# Altium PCB ACDC.PcbDoc (part 2 of 2)
Units mil, origin at the board's own origin, x right, y up, seen from the top; angles counter-clockwise.
Board outline 4750 x 3251 mil, 4 copper layers (Top Layer, GND, 3V3, Bottom Layer), stack 23.756 mil thick; 141 components, 109 nets, 697 pads, 528 vias.
Unrouted connection lines stored in the file: 62.
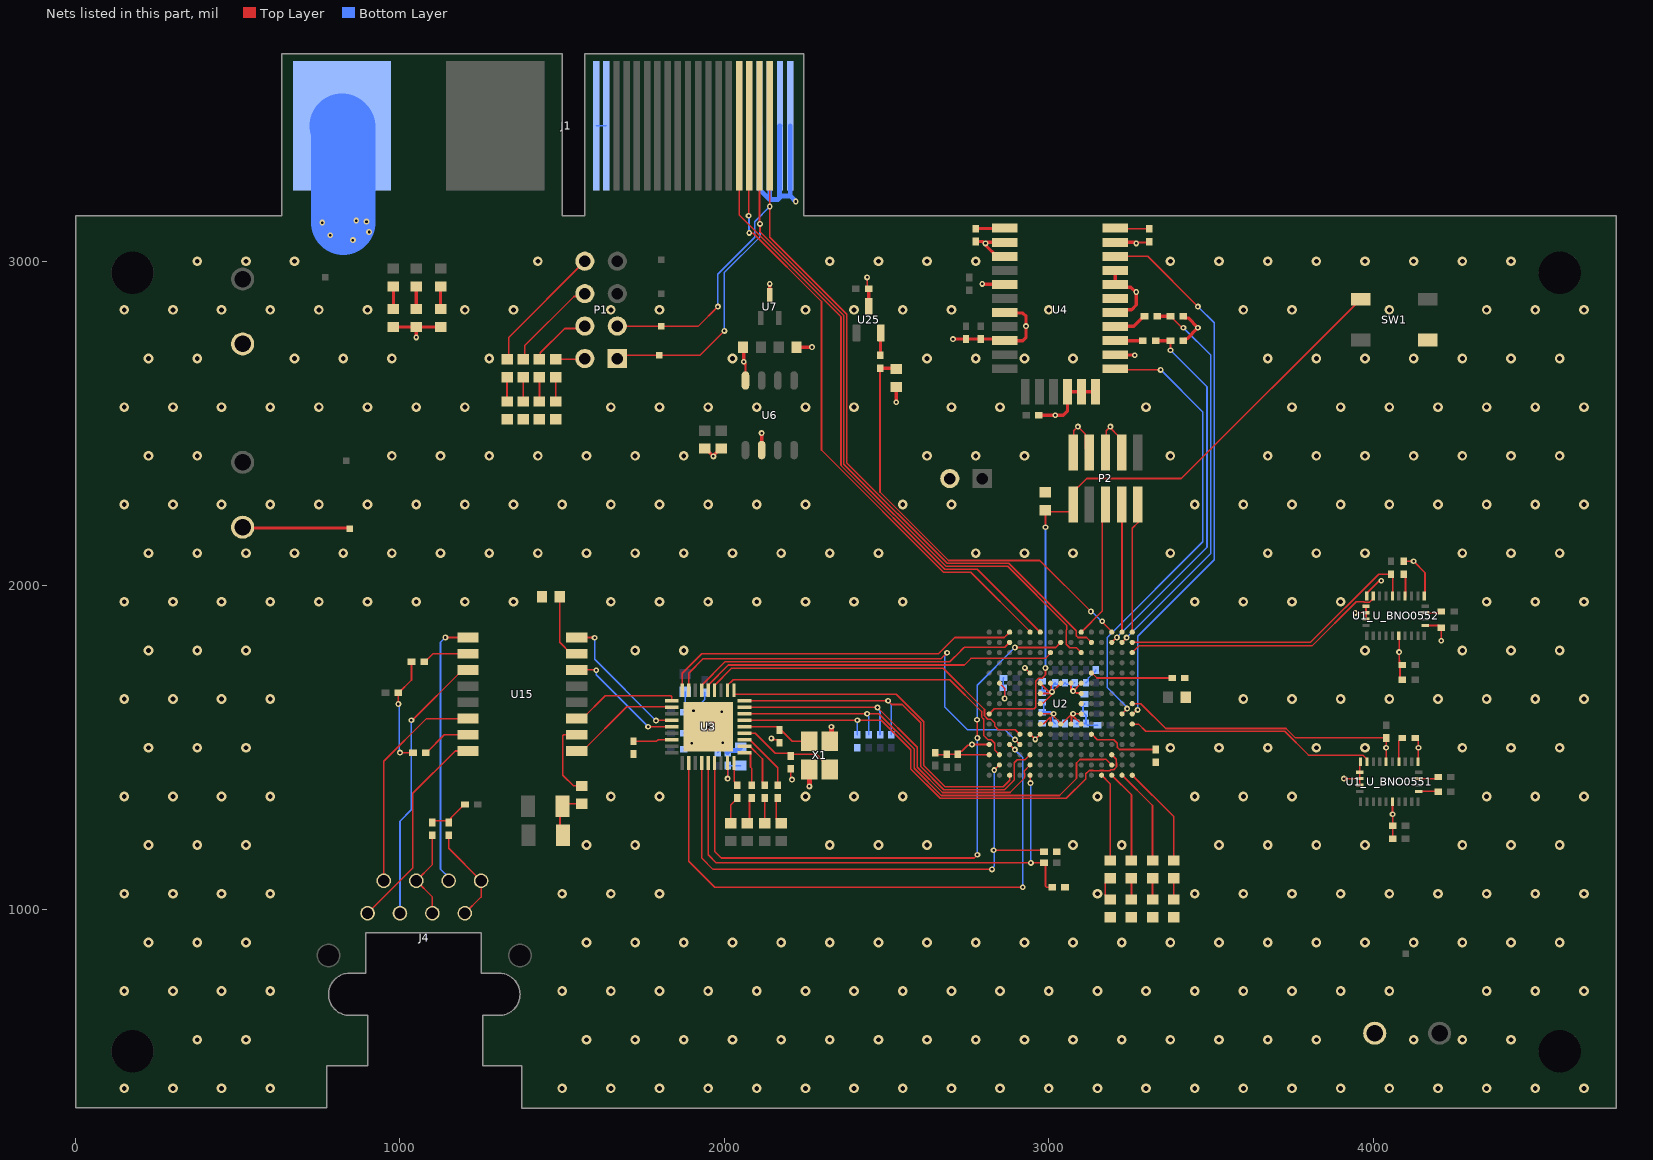
[diagram p4: the nets of this part, all layers, seen from the top]

## Via types
v1: diameter 30, hole 15, Top Layer to Bottom Layer, 352 vias
v2: diameter 18, hole 8, Top Layer to Bottom Layer, 148 vias
v3: diameter 17.72, hole 7.87, Top Layer to Bottom Layer, 27 vias
v4: diameter 18, hole 10, Top Layer to Bottom Layer, 1 vias

## Nets (pads, with @x,y where several pads share a name; then routed paths per layer and width w, separated by ;. In a path a pad name is that pad's centre, name@x,y a point inside that pad or via, vN(x,y) a via of type N, cw(c..) or ccw(c..) an arc to the next point about the centre after c; other vN are vias at no path point) (continued)
FIX': U2.J14 U4.18 | length 1409.9
  Top Layer w5: U4.18@3205.16,2668.39 3208.54,2665 v2(3345,2665) ; U2.J14@3225.98,1604.49 3225.98,1604.68 3241.73,1620.43 v2(3241.73,1620.62)
  Bottom Layer w5: v2(3241.73,1620.62) 3241.73,1624.02 3180,1685.75 3180,1840 3475,2135 3475,2535 v2(3345,2665)
GND: C1_U_BNO0551.1 C1_U_BNO0552.1 C2_U_BNO0551.1 C2_U_BNO0552.1 C3_U_BNO0551.1 C3_U_BNO0552.1 C4_U_BNO0551.1 C4_U_BNO0552.1 C5.1 C6.1 C7.1 C8.1 C9.1 C10.1 C11.1 C12.1 C13.1 C14.1 C15.1 C16.1 C17.1 C18.1 C19.1 C20.1 C21.1 C22.1 C23.1 C24.1 C26.1 C27.1 C28.1 C29.1 C30.1 C31.1 C32.1 C33.2 C34.1 C35.1 C36.1 C37.1 C38.1 C39.1 C40.1 C41.1 C42.1 C43.2 C44.2 C45.2 C46.2 C47.2 C48.2 C49.2 C50.2 C51.2 C52.2 C53.2 C54.1 C146.1 C167.2 C168.2 D1.2 D2.2 D3.2 D4.2 D5.2 D6.2 D7.2 D9-D12.2 D10.2 D11.2 D12.2 J1.22 J1.40 J1.41 J1.42 J1.43 J14.2 J15.2 J16.2 J17.1 L1.2 P1.2@2695,2330 P2.3 P2.5 P2.7 P2.9 R8.2 R11.1 R18.1 R19.1 R51.2 SW1.4 U1_U_BNO0551.2 U1_U_BNO0551.6 U1_U_BNO0551.15 U1_U_BNO0551.16 U1_U_BNO0551.17 U1_U_BNO0551.18 U1_U_BNO0551.25 U1_U_BNO0552.2 U1_U_BNO0552.6 U1_U_BNO0552.15 U1_U_BNO0552.16 U1_U_BNO0552.17 U1_U_BNO0552.18 U1_U_BNO0552.25 U2.E5 U2.F2 U2.F6 U2.F7 U2.F8 U2.F9 U2.F10 U2.G6 U2.G10 U2.H6 U2.H10 U2.J6 U2.J10 U2.K6 U2.K7 U2.K8 U2.K9 U2.K10 U2.L5 U2.L6 U2.M1 U2.N1 U3.37 U4.2 U4.3 U4.5 U4.7 U4.9 U4.15 U4.16 U4.17 U4.19 U4.22 U4.23 U4.24 U4.25 U4.27 U6.2 U6.8 U7.3 U25.3 X1.2 X1.4 | length 7431.3
  Top Layer w5: R51.2@1503.15,1230 1493.15,1240 1493.15,1311.85 C146.1@1501.3,1320 1501.3,1327.44 C49.2@1560,1327.44 ; U6.8@2065,2632.28 v2@2065,2682.84 ; v2@2145,1530 2150.06,1524.94 2162.66,1524.94 2170,1517.6 C54.1@2170,1515.63 ; C45.2@2205,1435.31 2205,1405 v2@2210,1400 ; v2(2440,2950) 2440,2919.69 C168.2@2444.69,2915 ; C37.1@2650,1479.68 2650.9,1478.78 2684.1,1478.78 C36.1@2685,1479.68 2705.42,1479.68 2705.59,1479.85 2712.66,1479.85 2712.66,1480.59 2721.07,1489 2732.07,1489 2750.59,1507.51 2762.51,1507.51 2765,1510 U2.M1@2816.54,1510 ; C38.1@2720,1479.68 2721.18,1478.5 U2.N1@2816.54,1478.5 ; U2.F2@2846.02,1698.98 U2.F2@2848.03,1698.98 2864,1683.01 v2(2864,1651.75) ; v2(2926.39,1746.22) 2926.58,1746.22 2942.33,1730.47 U2.E5@2942.52,1730.47 ; U2.L5@2942.52,1541.5 2942.76,1541.5 2958.26,1526 v2(2958.5,1526) U2.L6@2974.02,1541.5 ; U2.F6@2973.5,1697.01 U2.F6@2977.99,1697.01 ; U2.K6@2974.02,1572.99 2975.49,1574.46 2984.46,1574.46 3003.75,1593.75 ; U2.J6@2974.02,1604.49 2974.27,1604.74 3014.74,1604.74 v2(3015,1605) ; U2.H6@2974.02,1635.98 2976.12,1638.09 2983.22,1638.09 3010,1664.87 v2(3010,1672.2) ; U2.G6@2974.02,1667.48 3001.76,1667.48 v2@3006.48,1672.2 ; U2.F6@2974.02,1698.98 2998.31,1674.69 3007.51,1674.69 v2(3010,1672.2) ; v2@3004.64,1670.36 v2@3006.48,1672.2 ; U2.K7@3005.51,1572.99 3005.51,1591.99 3015,1601.48 v2(3015,1605) ; U2.F7@3005.51,1698.98 3007.62,1696.87 v2@3007.62,1674.58 ; U2.K8@3036.5,1571.26 3036.5,1575.63 3017.49,1594.64 3017.49,1601.48 3015,1603.97 v2(3015,1605) ; U2.K8@3036.5,1572.48 U2.K8@3037.01,1572.99 3039.98,1572.99 3071.99,1605 v2(3075,1605) ; U2.F8@3037.01,1698.98 3036.89,1698.98 3010.11,1672.2 v2(3010,1672.2) ; U2.K9@3068.5,1572.99 3070,1574.49 3070,1596.48 3075,1601.48 v2@3075,1604.74 ; U2.F9@3068.5,1698.98 3068.5,1680.01 3073.83,1674.69 v2(3075,1674.69) 3075.35,1674.69 3099.65,1698.98 U2.F10@3100,1698.98 ; P2.9@3075,2410.24 3077.07,2412.3 3077.07,2477.07 v2(3090,2490) 3112.93,2467.07 3112.93,2422.3 P2.7@3125,2410.24 ; v2@3078.52,1674.69 3084.5,1668.7 3098.78,1668.7 U2.G10@3100,1667.48 ; U2.K10@3100,1572.99 3077.49,1595.5 3077.49,1602.51 v2(3075,1605) ; U2.J10@3100,1604.49 3099.74,1604.74 v2@3075,1604.74 ; P2.5@3175,2410.24 3177.07,2412.3 3177.07,2477.07 v2(3190,2490) 3192.49,2487.51 3192.49,2483.1 3212.93,2462.66 3225,2450.59 P2.3@3225,2435.59 ; P2.3@3215,2445.59 P2.3@3225,2435.59 ; P2.3@3225,2410.24 P2.3@3225,2435.59 ; v2(3270,3055) 3272.49,3057.49 3302.49,3057.49 3307.66,3062.66 L1.2@3310,3060.31 ; v2(3910,1405) 3910.08,1404.92 3958.88,1404.92 U1_U_BNO0551.17@3958.96,1404.84 ; v2@3945,1915 3946.36,1916.36 U1_U_BNO0552.17@3977.42,1916.36 ; U1_U_BNO0551.18@3958.96,1385.16 U1_U_BNO0551.17@3958.96,1404.84 ; U1_U_BNO0551.15@3961.42,1456.52 3961.42,1448.15 3958.96,1445.69 U1_U_BNO0551.16@3958.96,1424.53 U1_U_BNO0551.17@3958.96,1404.84 ; U1_U_BNO0552.16@3969.75,1938.46 3972.17,1936.04 U1_U_BNO0552.16@3975.51,1936.04 ; U1_U_BNO0552.16@3974,1934.53 U1_U_BNO0552.16@3975.51,1936.04 ; U1_U_BNO0552.18@3975,1899.09 3977.42,1896.67 U1_U_BNO0552.18@3978.17,1896.67 U1_U_BNO0552.17@3978.17,1916.36 U1_U_BNO0552.17@3977.42,1916.36 ; U1_U_BNO0552.15@3980.63,1968.03 3980.63,1976.4 4019.23,2015 v2(4025,2015) ; v2@4059.84,1294.68 U1_U_BNO0551.25@4059.84,1333.48 ; v2(4060,1295) 4060,1260.32 C4_U_BNO0551.1@4060.32,1260 C3_U_BNO0551.1@4060.32,1220 ; U1_U_BNO0552.25@4080,1847.84 4081,1846.84 4081,1770.52 4081.37,1770.15 4081.37,1762.34 4082.84,1762.34 4082.84,1717.34 4090.18,1710 C3_U_BNO0552.1@4090.32,1710 ; C4_U_BNO0552.1@4081,1762.34 4088.35,1755 C4_U_BNO0552.1@4090.32,1755 ; C2_U_BNO0552.1@4095,2074.68 4095.32,2075 v2(4125,2075) 4160,2040 U1_U_BNO0552.6@4160,1965.05 ; C2_U_BNO0551.1@4127.27,1530 4131.65,1530 4139,1522.66 4139,1501 v2(4140,1500) 4139.29,1499.29 4139.29,1457.22 U1_U_BNO0551.6@4138.58,1456.52 ; U1_U_BNO0551.2@4141.04,1365.47 4199.84,1365.47 C1_U_BNO0551.1@4200.31,1365 ; U1_U_BNO0552.2@4160.26,1876.99 4203.33,1876.99 C1_U_BNO0552.1@4210.31,1870 4210,1869.69 v2(4210,1830) ; v2@3006.48,1672.2 v2(3010,1672.2) ; v2@3075,1604.74 v2(3075,1605) ; U1_U_BNO0552.16@3975.51,1936.04 U1_U_BNO0552.16@3978.17,1936.04 3978.17,1917.11 U1_U_BNO0552.17@3977.42,1916.36
  Top Layer w10: J16.2@515,2180 517.5,2177.5 842.5,2177.5 J17.1@845,2175 ; D3.2@980,2797.44 D2.2@1050,2797.44 ; v2(1050,2765) D2.2@1050,2797.44 ; D1.2@1125,2797.44 D2.2@1050,2797.44 ; C33.2@1940,2422.44 1941.97,2422.44 v2(1966.1,2398.31) 1967.63,2399.84 1967.63,2402.04 1988.03,2422.44 C34.1@1990,2422.44 C34.1@1991.97,2422.44 ; C31.1@2057.44,2735 2060,2732.44 v2(2060,2690) 2060,2687.84 v2@2065,2682.84 ; U6.2@2115,2400.98 U6.2@2115,2417.72 v2(2115,2470) ; U7.3@2140,2895.43 v2(2140,2930) ; C32.1@2222.56,2735 v4(2270,2735) ; C168.2@2444.69,2915 2444.84,2914.84 2444.84,2861.5 U25.3@2445,2861.34 ; v2(2530,2565) C167.2@2530,2612.44 ; v2(2705,2760) 2705.16,2760.16 2744.84,2760.16 C27.1@2745,2760.32 C28.1@2790,2760.32 2790.31,2760 2860,2760 U4.9@2865,2755 2920,2755 2930,2765 v2(2930,2800) 2930,2830 2920,2840 ; R18.1@2775,3060.63 2797.21,3060.63 2802.84,3055 v2(2805,3055) ; v2(2795,2930) 2795.89,2929.11 2864.11,2929.11 U4.5@2865,2928.23 ; U4.3@2865,3015 2839.41,3015 2806.53,3047.88 2806.53,3053.47 v2(2805,3055) ; U4.2@2865,3058.31 2810.47,3058.31 2807.16,3055 v2(2805,3055) ; U4.7@2890.59,2840 2920,2840 ; U4.7@2890.59,2841.69 U4.7@2865,2841.69 2864.15,2840.85 2865,2840 2920,2840 ; C30.1@2969.68,2525 v2(3020,2525) 3045,2525 3057.52,2537.52 U4.15@3057.52,2597.52 U4.16@3100.83,2597.52 U4.17@3144.13,2597.52 ; U4.19@3205.16,2711.69 3206,2710.85 3264.15,2710.85 v2(3265,2710) ; U4.22@3205.16,2841.69 3213.94,2850.47 3255.47,2850.47 3270,2865 v2(3270,2905) 3267.84,2905 3253.39,2919.45 3213.94,2919.45 U4.24@3205.16,2928.23 U4.25@3205.16,2971.69 ; U4.27@3205.16,3058.31 3264.53,3058.31 3267.84,3055 v2(3270,3055) ; C29.1@3414.68,2755 3419.53,2759.84 3424.84,2759.84 v2(3460,2795) 3429.84,2825.16 3419.53,2825.16 C26.1@3414.68,2830
  Top Layer w15: v2@2260,1380 2262.01,1382.01 X1.2@2262.01,1433.39 ; X1.4@2325,1520 2330,1525 v2(2330,1565)
  Bottom Layer w5: J1.22@750,3346.75 J1.22@821,3417.75 ; C50.2@1874.37,1495 1876.34,1495 1892.86,1511.52 1897.51,1511.52 v2(1900,1514.01) 1897.51,1516.5 1897.51,1524.14 1876.65,1545 C44.2@1874.69,1545 ; C47.2@1874.69,1610 1878.7,1614.01 v2(1905,1614.01) ; C43.2@1880,1672.44 1880,1639.01 v2(1905,1614.01) ; C48.2@1940,1670.63 1940,1649.01 v2(1905,1614.01) ; C46.2@1980,1484.37 1980,1486.34 1994.74,1501.08 1995.57,1501.08 ; C14.1@2860.63,1715 2860,1714.37 C15.1@2860,1685 2864,1681 v2(2864,1651.75) ; C21.1@2979.68,1610 2979.86,1610.17 C21.1@2985,1610.17 ; C22.1@2979.68,1640 2985,1634.69 C21.1@2985,1610.17 ; C23.1@2980,1705 2979.68,1705 2979.68,1677.34 2980.67,1676.36 2988.01,1676.36 2988.01,1670.98 2989,1670 v2@3001.48,1670 ; C19.1@3020,1574.68 3012.66,1582.03 3012.66,1593.82 3010,1596.48 3015,1601.48 v2(3015,1605) 3011.48,1605 3006.31,1610.17 C21.1@2985,1610.17 ; C7.1@3072.66,1692.97 3072.66,1680.86 3075,1678.52 v2(3075,1674.69) ; C7.1@3080,1700.32 3077.66,1700.32 3072.66,1695.32 3055,1695.32 C6.1@3050,1700.32 3045,1695.32 3020.31,1695.32 3020,1695.63 C18.1@3020,1700.32 3012.66,1692.97 v2@3012.66,1678.37 ; C20.1@3085,1575 3085.32,1574.68 C13.1@3115,1574.68 ; C9.1@3110.32,1635 3105.63,1630.31 3105.63,1609.37 C8.1@3110,1605 3115,1600 C13.1@3115,1574.68 ; C11.1@3115,1700.32 3122.34,1707.66 3122.34,1715.06 3145,1737.72 C42.1@3145,1739.68 ; C12.1@3150.32,1570 3119.68,1570 C13.1@3115,1574.68 ; v2@3012.66,1678.37 3012.66,1674.86 v2(3010,1672.2) 3010,1675.72 v2@3012.66,1678.37
  Bottom Layer w15: v2@1995,1514.19 v2(1995,1515) 1995.57,1514.43 1995.57,1501.08 C53.2@2010,1486.65 ; C53.2@2010,1484.69 C53.2@2010,1486.65 ; C52.2@2050,1500.12 2041.75,1491.87 2015.22,1491.87 C53.2@2010,1486.65 ; J1.40@2108.5,3417.75 2110.84,3415.41 2110.84,3219.16 2140,3190 ; J1.41@2140,3417.75 2140,3190 ; J1.42@2171.5,3417.75 2170,3416.25 2170,3195 ; J1.43@2203,3417.75 2203,3201.31 ; v2(2220.23,3184.08) 2203,3201.31 ; 2140,3190 2165,3190 2170,3195 ; 2170,3195 2176.31,3201.31 2203,3201.31
  Bottom Layer w200: J1.22@821,3417.75 J1.22@825,3413.75 ; 825,3119.68 J1.22@825,3413.75 ; J1.22@825,3346.75 J1.22@825,3413.75
  other v1: 150,450 300,450 450,450 600,450 1500,450 1650,450 1800,450 1950,450 2100,450 2250,450 2400,450 2550,450 2700,450 2850,450 3000,450 3150,450 3300,450 3450,450 3600,450 3750,450 3900,450 4050,450 4200,450 4350,450 4500,450 4650,450 375,600 525,600 1575,600 1725,600 1875,600 2025,600 2175,600 2325,600 2475,600 2625,600 2775,600 2925,600 3075,600 3225,600 3375,600 3525,600 3675,600 3825,600 4125,600 4275,600 4425,600 150,750 300,750 450,750 600,750 1500,750 1650,750 1800,750 1950,750 2100,750 2250,750 2400,750 2550,750 2700,750 2850,750 3000,750 3150,750 3300,750 3450,750 3600,750 3750,750 3900,750 4050,750 4350,750 4500,750 4650,750 225,900 375,900 525,900 1575,900 1725,900 1875,900 2025,900 2175,900 2325,900 2475,900 2625,900 2775,900 2925,900 3075,900 3225,900 3375,900 3525,900 3675,900 3825,900 3975,900 4125,900 4275,900 4425,900 4575,900 150,1050 300,1050 450,1050 600,1050 1500,1050 1650,1050 1800,1050 3150,1050 3450,1050 3600,1050 3750,1050 3900,1050 4050,1050 4200,1050 4350,1050 4500,1050 4650,1050 225,1200 375,1200 525,1200 1575,1200 1725,1200 2325,1200 2475,1200 2625,1200 3075,1200 3225,1200 3525,1200 3675,1200 3825,1200 3975,1200 4275,1200 4425,1200 4575,1200 150,1350 300,1350 450,1350 600,1350 1650,1350 1800,1350 2250,1350 2400,1350 2550,1350 3150,1350 3450,1350 3600,1350 3750,1350 4350,1350 4500,1350 4650,1350 225,1500 375,1500 525,1500 3375,1500 3525,1500 3675,1500 3825,1500 3975,1500 4275,1500 4425,1500 4575,1500 150,1650 300,1650 450,1650 600,1650 3600,1650 3750,1650 3900,1650 4050,1650 4200,1650 4350,1650 4500,1650 4650,1650 225,1800 375,1800 525,1800 1725,1800 1875,1800 3975,1800 4275,1800 4425,1800 4575,1800 150,1950 300,1950 450,1950 600,1950 750,1950 900,1950 1050,1950 1200,1950 1350,1950 1650,1950 1800,1950 1950,1950 2100,1950 2250,1950 2400,1950 2550,1950 3450,1950 3600,1950 3750,1950 3900,1950 4350,1950 4500,1950 4650,1950 225,2100 375,2100 525,2100 675,2100 825,2100 975,2100 1125,2100 1275,2100 1425,2100 1575,2100 1725,2100 1875,2100 2025,2100 2175,2100 2325,2100 2475,2100 2775,2100 2925,2100 3075,2100 3375,2100 3675,2100 3825,2100 3975,2100 4275,2100 4425,2100 4575,2100 150,2250 300,2250 450,2250 600,2250 750,2250 900,2250 1050,2250 1200,2250 1350,2250 1500,2250 1650,2250 1800,2250 1950,2250 2100,2250 2250,2250 2550,2250 2700,2250 3450,2250 3600,2250 3750,2250 3900,2250 4050,2250 4200,2250 4350,2250 4500,2250 4650,2250 225,2400 375,2400 975,2400 1125,2400 1275,2400 1425,2400 1575,2400 1725,2400 1875,2400 2625,2400 2775,2400 2925,2400 3375,2400 3675,2400 3825,2400 3975,2400 4125,2400 4275,2400 4425,2400 4575,2400 150,2550 300,2550 450,2550 600,2550 750,2550 900,2550 1050,2550 1200,2550 1650,2550 1800,2550 1950,2550 2100,2550 2250,2550 2400,2550 2700,2550 2850,2550 3300,2550 3750,2550 3900,2550 4050,2550 4200,2550 4350,2550 4500,2550 4650,2550 225,2700 375,2700 675,2700 825,2700 975,2700 1275,2700 2025,2700 2625,2700 2775,2700 2925,2700 3075,2700 3675,2700 3825,2700 3975,2700 4125,2700 4275,2700 4425,2700 4575,2700 150,2850 300,2850 450,2850 600,2850 750,2850 900,2850 1200,2850 1350,2850 1650,2850 1800,2850 2250,2850 2400,2850 2550,2850 2700,2850 3000,2850 3600,2850 3750,2850 4050,2850 4350,2850 4500,2850 4650,2850 375,3000 525,3000 675,3000 1425,3000 2325,3000 2475,3000 2625,3000 2775,3000 3375,3000 3525,3000 3675,3000 3825,3000 3975,3000 4125,3000 4275,3000 4425,3000
  other v2: 2262.01,1381.02 2208.5,1401.93 2763.5,1510 2145,1529.01 1950,1565 1991.57,1611.27 4080,1795 3944.86,1915.9 855,3065 785,3080 905,3090 760.23,3119.08 896.83,3121.87 865,3125
GPSRX: C29.2 L3.2 U2.B13 | length 1144.1
  Top Layer w5: U2.B13@3194.49,1824.96 3194.69,1824.96 3209.76,1840.04 v2(3209.96,1840.04) ; v2(3375.31,2725.31) C29.2@3375.31,2755
  Top Layer w10: L3.2@3329.69,2755 C29.2@3375.31,2755
  Bottom Layer w5: v2(3209.96,1840.04) 3487.91,2117.99 3487.91,2612.72 v2(3375.31,2725.31)
GPSTX: C26.2 L2.2 U2.B14 | length 1214.6
  Top Layer w5: U2.B14@3225.98,1824.96 3225.98,1825.2 3240.25,1839.47 v2(3240.25,1839.71) ; C26.2@3375.31,2830 3377.28,2830 3384.63,2822.66 3384.63,2820.69 3407.83,2797.49 3412.51,2797.49 v2(3415,2795)
  Top Layer w10: L2.2@3334.69,2830 3368.35,2830 3368.5,2830.16 C26.2@3375.16,2830.16
  Bottom Layer w5: v2(3240.25,1839.71) 3500,2099.46 3500,2710 v2(3415,2795)
HW_S: U2.J15 U4.26 | length 1702.6
  Top Layer w5: U4.26@3205.16,3015 3305,3015 v2(3460,2860) ; U2.J15@3257.48,1604.49 3258.38,1604.49 3268.89,1615 v2@3275,1615
  Bottom Layer w5: v2(3274,1616.75) 3274,1844 3510,2080 3510,2810 v2(3460,2860)
INT: U1_U_BNO0552.14 U2.C15 | length 821.5
  Top Layer w5: U2.C15@3257.48,1793.46 3279.02,1815 3812.93,1815 3947.93,1950 3971.26,1950 3973.02,1948.24 3988.89,1948.24 4000.32,1959.67 U1_U_BNO0552.14@4000.32,1968.03
INT_U_BNO0551: U1_U_BNO0551.14 U2.K15 | length 773.3
  Top Layer w5: U2.K15@3257.48,1572.99 3277.01,1572.99 3299.5,1550.5 3727.88,1550.5 3800.87,1477.5 3968.48,1477.5 3981.1,1464.88 U1_U_BNO0551.14@3981.1,1460
LED0: R13-16.2 U2.R12 | length 274.1
  Top Layer w5: U2.R12@3162.99,1415.51 3190,1388.5 R13-16.2@3190,1152.56
LED1: R14.2 U2.R13 | length 288
  Top Layer w5: U2.R13@3194.49,1415.51 3255,1355 R14.2@3255,1152.56
LED2: R15.2 U2.R14 | length 302.2
  Top Layer w5: U2.R14@3225.98,1415.51 3226.57,1415.51 3320,1322.08 R15.2@3320,1152.56
LED3: R16.2 U2.R15 | length 315.8
  Top Layer w5: U2.R15@3257.48,1415.51 3385,1287.99 R16.2@3385,1152.56
M2RBRX: J1.19 J5.1 P1.3 U2.B11 | length 2839.9
  Top Layer w5: P1.3@1670,2800 J5.1@1805,2800 1920,2800 v2(1980,2860) ; J1.19@2140,3417.75 v2(2140,3168.5) 2140,3073.6 2377.5,2836.1 2377.5,2377.95 2686.95,2068.5 2876.97,2068.5 3085,1860.47 3085,1845 3090,1840 3116.46,1840 U2.B11@3131.5,1824.96
  Bottom Layer w5: v2(1980,2860) 1980,2960 2093.42,3073.42 2093.42,3121.92 v2(2140,3168.5)
M2RBTX: J1.18 J4.1@1800,2710 P1.1@1670,2700 U2.C10 | length 2900
  Top Layer w5: P1.1@1670,2700 1680,2710 1805,2710 1925,2710 v2(2000,2785) ; J1.18@2108.5,3417.75 2108.5,3116.5 2110,3115 2109.92,3114.92 2109.92,3090.96 2368.5,2832.38 2368.5,2374.22 2683.22,2059.5 2873.24,2059.5 3055,1877.74 3055,1863.46 3054,1862.46 3054,1818.95 3064.99,1807.96 3085.5,1807.96 U2.C10@3100,1793.46
  Bottom Layer w5: v2(2000,2785) 2000,2965 2109.92,3074.92 v2(2109.92,3115.08)
MDC: U2.M3 U3.2 | length 1823.1
  Top Layer w5: U3.2@1890,1453 1890,1150 1970,1070 v2(2920,1070) ; U2.M3@2879.53,1510 2879.72,1510 2895.47,1494.25 v2(2895.66,1494.25)
  Bottom Layer w5: v2(2895.66,1494.25) 2920,1469.91 v2(2920,1070)
MDIO: R8.1 U2.P2 U3.4 | length 1693.5
  Top Layer w5: U3.4@1930,1453 1930,1160 1965,1125 v2(2825,1125) ; v2(2830,1184.01) 2981.62,1184.01 R8.1@2985.63,1180 R8.1@2983.66,1180 ; v2(2831.9,1431.26) 2832.09,1431.26 2847.84,1447.01 U2.P2@2848.03,1447.01
  Bottom Layer w5: v2(2825,1125) 2825,1128.52 2831.9,1135.42 v2(2831.9,1431.26)
NetC2_U_BNO0551_2: C2_U_BNO0551.2 U1_U_BNO0551.9 | length 79.1
  Top Layer w5: U1_U_BNO0551.9@4079.53,1456.52 4079.53,1521.18 4088.35,1530 C2_U_BNO0551.2@4090.31,1530
NetC2_U_BNO0552_2: C2_U_BNO0552.2 U1_U_BNO0552.9 | length 73
  Top Layer w5: C2_U_BNO0552.2@4095,2035.31 4100,2030.32 U1_U_BNO0552.9@4100,1964.34
NetC40_2: C40.2 U2.L11 | length 225
  Top Layer w5: U2.L11@3131.5,1541.5 3133.5,1541.5 3150,1525 3200,1525 3211.48,1513.52 3211.48,1503.99 3211.94,1503.54 3211.94,1500.99 3218.24,1494.69 C40.2@3330,1494.69
NetC41_2: C41.2 U2.E11 | length 255.2
  Top Layer w5: U2.E11@3131.5,1730.47 3133.38,1730.47 3148.85,1715 C41.2@3380.31,1715
NetC49_1: C49.1 U15.2 | length 237.4
  Top Layer w5: U15.2@1545.04,1540 1505.06,1540 1502.13,1537.07 1502.13,1415.21 1534.78,1382.56 C49.1@1560,1382.56
NetC51_1: C51.1 U15.7 | length 189.5
  Top Layer w5: C51.1@1492.56,1965 1492.56,1824.96 U15.7@1527.52,1790
NetC142_1: C142.1 R44.2 R45.2 | length 131.5
  Top Layer w5: R45.2@1100,1269.69 1105,1274.69 1145,1274.69 R44.2@1150,1269.69 1157.34,1277.03 1157.34,1284 1198.35,1325 C142.1@1200.32,1325
NetC145_1: C145.1 R43.1 R46.1 | length 340.6
  Top Layer w5: v2(995.04,1635) 994.68,1635.32 C145.1@994.68,1670 996.65,1670 1035.63,1708.98 R46.1@1035.63,1765 ; v2(1000,1485) R43.1@1040.32,1485
  Bottom Layer w5: v2(995.04,1635) 997.52,1632.52 997.52,1487.48 v2(1000,1485)
NetC167_1: C167.1 R52.2 U2.A13 | length 1329
  Top Layer w5: R52.2@2480,2670.31 2480,2288.18 2690.68,2077.5 2972.5,2077.5 v2(3130,1920) ; v2(3165,1890) 3165,1887.97 3194.49,1858.48 U2.A13@3194.49,1856.46
  Top Layer w10: R52.2@2480,2670.31 2527.24,2670.31 C167.1@2530,2667.56
  Bottom Layer w5: v2(3130,1920) 3132.5,1920 3162.5,1890 v2(3165,1890)
NetD1_1: D1.1 R1.1 | length 69.9
  Top Layer w10: D1.1@1125,2852.56 R1.1@1125,2922.44
NetD2_1: D2.1 R2.1 | length 69.9
  Top Layer w10: D2.1@1050,2852.56 R2.1@1050,2922.44
NetD3_1: D3.1 R3.1 | length 69.9
  Top Layer w10: D3.1@980,2852.56 R3.1@980,2922.44
NetD4_1: D4.1 R4.1 | length 74.9
  Top Layer w5: D4.1@1480,2567.56 R4.1@1480,2642.44
NetD5_1: D5.1 R5.1 | length 74.9
  Top Layer w5: D5.1@1430,2567.56 R5.1@1430,2642.44
NetD6_1: D6.1 R6.1 | length 74.9
  Top Layer w5: D6.1@1380,2567.56 R6.1@1380,2642.44
NetD7_1: D7.1 R7.1 | length 74.9
  Top Layer w5: D7.1@1330,2567.56 R7.1@1330,2642.44
NetD8_2: D8.2 R9.1 | length 127
  Top Layer w5: R9.1@2040,1345.32 2040,1343.35 2035.98,1339.33 2020,1323.35 D8.2@2020,1267.56 ; D8.2@2020,1267.56 D8.2@2021.75,1267.56 ; D8.2@2020,1267.56 D8.2@2021.75,1267.56 ; D8.2@2021.75,1267.56 2035,1280.81 D8.2@2021.75,1267.56
NetD9-D12_1: D9-D12.1 R13-16.1 | length 79.8
  Top Layer w5: D9-D12.1@3190,1032.56 3188.03,1032.56 3174.78,1045.81 3174.78,1084.19 3188.03,1097.44 R13-16.1@3190,1097.44
NetD9_2: D9.2 R12.1 | length 84
  Top Layer w5: D9.2@2070,1267.56 2077.66,1275.22 2077.66,1337.97 R12.1@2085,1345.32
NetD10_1: D10.1 R14.1 | length 64.9
  Top Layer w5: D10.1@3255,1032.56 R14.1@3255,1097.44
NetD11_1: D11.1 R15.1 | length 64.9
  Top Layer w5: D11.1@3320,1032.56 R15.1@3320,1097.44
NetD12_1: D12.1 R16.1 | length 64.9
  Top Layer w5: D12.1@3385,1032.56 R16.1@3385,1097.44
NetD13_2: D13.2 R13.1 | length 82.7
  Top Layer w5: D13.2@2125,1267.56 2125,1333.35 2119.02,1339.33 R13.1@2125,1345.32
NetD14_2: D14.2 R17.1 | length 87.4
  Top Layer w5: R17.1@2165,1345.32 2159.78,1340.1 2159.78,1280.81 2173.03,1267.56 D14.2@2175,1267.56
NetJ1_16: J1.16 U2.A6 | length 2004.8
  Top Layer w5: J1.16@2045.5,3417.75 2045.5,3142.65 2359.5,2828.65 2359.5,2370.5 2679.5,2050.5 2779.97,2050.5 U2.A6@2974.02,1856.46
NetJ1_17: J1.17 U2.A5 | length 1977
  Top Layer w5: v2(2074.92,3140.08) 2074.92,3196.25 2075,3196.33 2075,3415.75 J1.17@2077,3417.75 ; v2(2076.92,3087.25) 2077.96,3086.21 2089.21,3086.21 2299.37,2876.05 2299.37,2417.9 2675.77,2041.5 2759.21,2041.5 2942.52,1858.19 U2.A5@2942.52,1856.46
  Bottom Layer w5: v2(2074.92,3140.08) 2075.92,3139.08 2075.92,3088.25 v2(2076.92,3087.25)
NetJ1_24: J1.24 J1.25 | length 31.5
  Bottom Layer w5: J1.24@1604.5,3417.75 J1.25@1636,3417.75
NetJ4_4: J4.4 J4.5 R45.1 | length 281.7
  Top Layer w5: J4.5@1100,990 1100,1040 J4.4@1050,1090 1100,1140 R45.1@1100,1230.32
NetJ4_7: J4.7 J4.8 R44.1 | length 302.4
  Top Layer w5: R44.1@1150,1230.32 1150,1190 J4.8@1250,1090 1250,1040 J4.7@1200,990
NetL1_1: L1.1 U4.28 | length 105.7
  Top Layer w5: U4.28@3205.16,3101.69 3207.17,3099.68 L1.1@3310,3099.68
NetL2_1: L2.1 U4.21 | length 103.3
  Top Layer w10: U4.21@3205.16,2798.31 3206,2799.15 3262.5,2799.15 3293.35,2830 L2.1@3295.32,2830
NetL3_1: L3.1 U4.20 | length 85.2
  Top Layer w10: U4.20@3205.16,2755 L3.1@3290.32,2755
NetP1_2: P1.2@1570,2700 R4.2 | length 91
  Top Layer w5: R4.2@1480,2697.56 1567.56,2697.56 P1.2@1570,2700
NetP1_4: P1.4 R5.2 | length 192.6
  Top Layer w5: R5.2@1430,2697.56 1432.88,2700.44 1432.88,2717.88 1507.54,2792.54 1562.54,2792.54 P1.4@1570,2800
NetP1_6: P1.6 R6.2 | length 295.8
  Top Layer w5: R6.2@1380,2697.56 1385,2702.56 1385,2740 1536.32,2891.32 1561.32,2891.32 P1.6@1570,2900
NetP1_8: P1.8 R7.2 | length 401.9
  Top Layer w5: R7.2@1330,2697.56 1335,2702.56 1335,2765 P1.8@1570,3000
NetR4_U_BNO0551_2: R4_U_BNO0551.2 U1_U_BNO0551.4 | length 61.4
  Top Layer w5: U1_U_BNO0551.4@4141.04,1404.84 4195.16,1404.84 R4_U_BNO0551.2@4200.31,1410
NetR4_U_BNO0552_2: R4_U_BNO0552.2 U1_U_BNO0552.4 | length 56.4
  Top Layer w5: U1_U_BNO0552.4@4156.04,1914.84 4205.16,1914.84 R4_U_BNO0552.2@4210.31,1920
NetR9_2: R9.2 U3.9 | length 72.5
  Top Layer w5: U3.9@2030,1453 2030,1396.65 2040,1386.65 R9.2@2040,1384.69
NetR11_2: R11.2 U3.34 | length 120.1
  Top Layer w5: R11.2@1720,1520 1790.92,1520 1795.92,1525 U3.34@1838,1525
NetR12_2: R12.2 U3.10 | length 119.2
  Top Layer w5: U3.10@2062,1485 2078,1485 2080.5,1482.5 2080.5,1440.5 2085,1436 R12.2@2085,1384.69
NetR13_2: R13.2 U3.11 | length 155.8
  Top Layer w5: U3.11@2062,1505 2078,1505 2117.66,1465.34 2117.66,1392.03 R13.2@2125,1384.69
NetR17_2: R17.2 U3.12 | length 192.4
  Top Layer w5: U3.12@2062,1525 2078,1525 2165,1438 R17.2@2165,1384.69
NetR18_2: R18.2 U4.1 | length 90.7
  Top Layer w10: R18.2@2775,3100 2775.85,3100.85 2864.15,3100.85 U4.1@2865,3101.69
NetR43_2: R43.2 U15.15 | length 153.1
  Top Layer w5: R43.2@1079.69,1485 1081.65,1485 1136.65,1540 U15.15@1210,1540
NetR46_2: R46.2 U15.10 | length 145.4
  Top Layer w5: R46.2@1075,1765 1076.97,1765 1101.97,1790 U15.10@1210,1790
NetR52_1: R52.1 U25.2 | length 70
  Top Layer w10: R52.1@2480,2709.68 2481.2,2710.89 2481.2,2777.46 U25.2@2482.4,2778.66
nRESET: R5_U_BNO0552.1 U1_U_BNO0552.11 U2.B15 | length 954.6
  Top Layer w5: U2.B15@3257.48,1824.96 3806.78,1824.96 4017.13,2035.32 R5_U_BNO0552.1@4055,2035.32 4060,2030.31 U1_U_BNO0552.11@4060,1967.4
nRESET_U_BNO0551: R5_U_BNO0551.1 U1_U_BNO0551.11 U2.H15 | length 900.2
  Top Layer w5: U2.H15@3257.48,1635.98 3284.02,1635.98 3360.5,1559.5 3731.61,1559.5 3760.79,1530.32 R5_U_BNO0551.1@4040,1530.32 4040.16,1530.16 4040.16,1500 U1_U_BNO0551.11@4040.16,1456.52
  other v2: 4040,1500
NRST: C5.2 P2.10 SW1.1 U2.J1 | length 2096.7
  Top Layer w5: U2.J1@2816.54,1604.49 2832.05,1620 2955,1620 2960,1625 2960,1629.49 2959.52,1629.98 2959.52,1704.98 2968.01,1713.48 2968.66,1713.48 2969.9,1714.72 2979.72,1714.72 2990,1725 2990,1745.6 v2(2989.76,1745.83) ; v2@2990,2188.52 C5.2@2990,2227.44 ; 2990,2190 C5.2@2990,2227.44 ; SW1.1@3961.65,2882.99 3408.66,2330 3117.08,2330 3089.5,2302.42 3087.07,2302.42 3075,2290.35 3075,2239.51 3062.93,2227.44 C5.2@2995,2227.44 ; C5.2@2990,2227.44 C5.2@2990,2232.44 ; C5.2@2990,2232.44 C5.2@2995,2227.44 ; C5.2@2990,2232.44 C5.2@2995,2227.44 ; C5.2@2990,2232.44 C5.2@2995,2227.44
  Bottom Layer w5: v2(2989.76,1745.83) 2989.88,1745.95 2989.88,2179.88 v2(2990,2180)
RST: C39.2 R10.2 U2.R5 U3.5 | length 1696.4
  Top Layer w5: U3.5@1950,1453 1950,1170 1975,1145 v2(2945,1145) R10.2@2985.31,1145 2990,1140.31 2990,1072.93 2992.93,1070 C39.2@3010.94,1070 ; U2.R5@2942.52,1415.51 2943.14,1414.89 2943.14,1391.86 v2(2943.76,1391.24)
  Bottom Layer w5: v2(2943.76,1391.24) 2944.38,1390.62 2944.38,1145.62 v2(2945,1145)
RX+: J4.3 U15.11 | length 848.7
  Top Layer w5: v2(1035,1585) 1037.48,1585 1192.48,1740 U15.11@1210,1740
  Bottom Layer w5: J4.3@1000,990 1000,1273.65 1035,1308.65 v2(1035,1585)
RX-: J4.6 U15.9 | length 836.6
  Top Layer w5: v2(1140,1840) U15.9@1210,1840
  Bottom Layer w5: v2(1140,1840) 1125,1825 1125,1125.82 1150,1100.82 J4.6@1150,1090
RXC: U2.N2 U3.20 | length 1008.5
  Top Layer w5: U3.20@2010,1677 2010,1693 2027,1710 2695,1710 2793.04,1611.96 2793.04,1594.75 2800,1587.79 2800,1537.53 2813,1524.52 2822.52,1524.52 2833.49,1513.55 2833.49,1493.05 U2.N2@2848.03,1478.5
RXD0: R22.2 U2.N5 U3.18 | length 1258.2
  Top Layer w5: U3.18@2062,1645 v2(2505,1645) 2516.46,1633.54 2548.54,1633.54 2605,1577.08 2605,1442.39 2676.39,1371 2863.73,1371 2893.57,1400.84 2893.57,1409.05 2894.03,1409.51 2894.03,1421.52 2893.57,1421.97 2893.57,1440.55 2894.03,1441 2894.03,1454.03 2902.91,1462.91 2926.92,1462.91 U2.N5@2942.52,1478.5
  Bottom Layer w5: v2(2505,1645) 2505,1641.66 2515,1631.67 R22.2@2515,1539.69
RXD1: R21.2 U2.P5 U3.17 | length 1163.2
  Top Layer w5: U3.17@2062,1625 2062.44,1624.56 2471.59,1624.56 2472.03,1625 v2(2472.03,1624.12) 2595,1501.15 2595,1439.66 2672.66,1362 2880.42,1362 2925,1406.58 2925,1408.98 2925.52,1409.51 2925.52,1421.52 2925,1422.04 2925,1429.49 U2.P5@2942.52,1447.01
  Bottom Layer w5: v2(2472.03,1624.12) 2472.03,1620.61 2480,1612.64 R21.2@2480,1539.69
RXD2: R20.2 U2.P13 U3.16 | length 1420.6
  Top Layer w5: U3.16@2062,1605 v2(2440,1605) 2476.06,1605 2585,1496.06 2585,1436.93 2668.93,1353 3033,1353 3085.5,1405.5 3085.5,1453.01 3096.49,1464 3169,1464 3169.99,1465 3176.5,1465 U2.P13@3194.49,1447.01
  Bottom Layer w5: v2(2440,1605) 2440,1601.48 2445,1596.48 R20.2@2445,1539.69
RXD3: R19.2 U2.N13 U3.15 | length 1420
  Top Layer w5: U3.15@2062,1585 v2(2410,1585) 2483.33,1585 2574.46,1493.88 2574.46,1434.75 2665.2,1344 3054,1344 3114.04,1404.04 3114.04,1409.05 3114.5,1409.51 3114.5,1419.5 3125.01,1430.01 3137.5,1430.01 3137.96,1429.56 3156.53,1429.56 3156.99,1430.01 3169,1430.01 3169.45,1429.56 3188.03,1429.56 3190.98,1432.51 3200.49,1432.51 3208.99,1441 3208.99,1453.01 3208.53,1453.47 3208.53,1464.46 U2.N13@3194.49,1478.5
  Bottom Layer w5: R19.2@2410,1539.69 v2(2410,1585)
RXDV: U2.R3 U3.19 | length 1081.2
  Top Layer w5: U3.19@2030,1677 2030,1667.5 2032.5,1665 2530,1665 2615,1580 2615,1445.12 2680.12,1380 2860,1380 2879.53,1399.53 U2.R3@2879.53,1415.51
RXN: U3.31 U15.8 | length 438
  Top Layer w5: U15.8@1545.04,1840 v2@1600,1840 ; v2(1789.29,1583.66) 1789.97,1584.33 1837.33,1584.33 U3.31@1838,1585
  Bottom Layer w5: v2(1600,1839.01) 1600,1772.95 v2(1789.29,1583.66)
RXP: U3.32 U15.6 | length 368.2
  Top Layer w5: U15.6@1545.04,1740 v2@1600,1740 ; v2(1765,1565) U3.32@1838,1565
  Bottom Layer w5: v2(1605,1739.01) 1605,1725 v2(1765,1565)
SDWIO: P2.2 U2.A15 | length 400.8
  Top Layer w5: U2.A15@3257.48,1856.46 3257.48,2177.13 3275,2194.65 P2.2@3275,2250
SWDCLK: P2.4 U2.A14 | length 394
  Top Layer w5: P2.4@3225,2250 3225,2235 3225.98,2234.02 U2.A14@3225.98,1856.46
SWO: P2.6 U2.A10 | length 424.6
  Top Layer w5: U2.A10@3100,1856.46 3165,1921.46 3165,2240 P2.6@3175,2250
TX+: J4.1@900,990 U15.16 | length 651.8
  Top Layer w5: J4.1@900,990 1039.59,1129.59 1039.59,1359.57 1170.02,1490 U15.16@1210,1490
TX-: J4.2 U15.14 | length 682.9
  Top Layer w5: J4.2@950,1090 950,1458.33 1081.67,1590 U15.14@1210,1590
TXC: U2.L4 U3.22 | length 1079.8
  Top Layer w5: U3.22@1970,1677 1970,1693 2022,1745 2675,1745 2802.04,1617.96 2802.04,1598.48 2812.4,1588.12 2821.92,1588.12 2833.53,1576.5 2833.53,1566.99 2844.52,1556 2896.52,1556 U2.L4@2911.02,1541.5
TXD0: U2.C7 U3.23 | length 1115.3
  Top Layer w5: U3.23@1950,1677 1950,1693 2012,1755 2740,1755 2760.5,1775.5 2809.56,1775.5 2810.53,1776.47 2980.02,1776.47 2980.99,1775.5 2989.95,1775.5 3005.51,1791.07 U2.C7@3005.51,1793.46
TXD1: U2.B3 U3.24 | length 1020.4
  Top Layer w5: U3.24@1930,1677 1930,1693 2002,1765 2695,1765 2728.5,1798.5 2728.5,1798.83 2738.17,1808.5 2738.5,1808.5 2740,1810 2864.57,1810 U2.B3@2879.53,1824.96
TXD2: U2.M4 U3.26 | length 1325.7
  Top Layer w5: U3.26@1890,1677 1890,1730 1935,1775 2668.67,1775 v2(2686.83,1793.17) ; v2(2896,1525) U2.M4@2911.02,1510
  Bottom Layer w5: v2(2686.83,1793.17) 2686.83,1790.57 2680,1783.74 2680,1625 2750,1555 2866,1555 v2(2896,1525)
TXD3: U2.A3 U3.27 | length 1112.8
  Top Layer w5: U3.27@1870,1677 1870,1730 1930,1790 2660.33,1790 2710.33,1840 2863.07,1840 U2.A3@2878.07,1855
TXEN: U2.B8 U3.6 | length 1931.4
  Top Layer w5: U3.6@1970,1453 1970,1180 1990,1160 2770,1160 v2(2780,1170) ; v2(2778.8,1586.41) 2779.82,1585.39 2779.82,1530.18 v2(2780,1530) ; v2(2895.66,1809.21) 3021.26,1809.21 U2.B8@3037.01,1824.96
  Bottom Layer w5: v2(2778.8,1586.41) 2779.64,1587.25 2779.64,1693.19 v2(2895.66,1809.21) ; v2(2780,1170) v2(2780,1530)
TXM: U3.28 U15.3 | length 335.8
  Top Layer w5: U15.3@1545.04,1590 1562.56,1590 1632.99,1660.43 1835.07,1660.43 1838,1657.5 U3.28@1838,1645
TXP: U3.29 U15.1 | length 350.1
  Top Layer w5: U15.1@1545.04,1490 1562.56,1490 1699.06,1626.5 1836.5,1626.5 U3.29@1838,1625
VDD_CORE: C52.1 C53.1 U3.8 | length 128.4
  Top Layer w5: v2(2010,1405) U3.8@2010,1453
  Bottom Layer w5: v2(2010,1405) C53.1@2010,1445.32 2010.31,1445 C52.1@2050,1445
X1: C54.2 U3.14 X1.1 | length 218.6
  Top Layer w5: U3.14@2062,1565 2164.44,1565 2209.44,1520 X1.1@2262.01,1520
X2: C45.1 U3.13 X1.3 | length 312.9
  Top Layer w5: U3.13@2062,1545 2095,1545 2156.56,1483.44 C45.1@2205,1483.44 ; C45.1@2205,1474.68 2210.32,1480 2283.31,1480 2325,1438.31 X1.3@2325,1433.39
pads on no net: J1.2 J1.3 J1.4 J1.5 J1.6 J1.7 J1.8 J1.9 J1.10 J1.11 J1.12 J1.13 J1.14 J1.15 J1.26 J1.27 J1.28 J1.29 J1.30 J1.31 J1.32 J1.33 J1.34 J1.35 J1.36 J1.37 J1.38 J1.39 J4.11 P2.8 SW1.2 SW1.3 U1_U_BNO0551.1 U1_U_BNO0551.7 U1_U_BNO0551.8 U1_U_BNO0551.10 U1_U_BNO0551.12 U1_U_BNO0551.13 U1_U_BNO0551.21 U1_U_BNO0551.22 U1_U_BNO0551.23 U1_U_BNO0551.24 U1_U_BNO0551.26 U1_U_BNO0551.27 U1_U_BNO0552.1 U1_U_BNO0552.7 U1_U_BNO0552.8 U1_U_BNO0552.10 U1_U_BNO0552.12 U1_U_BNO0552.13 U1_U_BNO0552.21 U1_U_BNO0552.22 U1_U_BNO0552.23 U1_U_BNO0552.24 U1_U_BNO0552.26 U1_U_BNO0552.27 U2.A1 U2.A2 U2.A4 U2.A8 U2.A9 U2.A11 U2.A12 U2.B1 U2.B2 U2.B5 U2.B6 U2.B7 U2.B9 U2.B10 U2.B12 U2.C2 U2.C3 U2.C4 U2.C5 U2.C6 U2.C8 U2.C9 U2.C11 U2.C12 U2.C13 U2.C14 U2.D1 U2.D2 U2.D3 U2.D4 U2.D5 U2.D6 U2.D7 U2.D8 U2.D9 U2.D10 U2.D11 U2.D12 U2.D13 U2.D14 U2.E1 U2.E2 U2.E3 U2.E4 U2.E12 U2.E13 U2.E14 U2.F1 U2.F3 U2.F12 U2.F13 U2.F14 U2.F15 U2.G1 U2.G2 U2.G3 U2.G4 U2.G12 U2.G13 U2.G14 U2.G15 U2.H1 U2.H2 U2.H3 U2.H4 U2.H12 U2.H13 U2.H14 U2.J2 U2.J3 U2.J4 U2.J12 U2.J13 U2.K1 U2.K2 U2.K3 U2.K4 U2.K12 U2.K13 U2.K14 U2.L1 U2.L2 U2.L3 U2.L12 U2.L13 U2.M2 U2.M5 U2.M6 U2.M7 U2.M8 U2.M9 U2.M10 U2.M11 U2.M12 U2.M13 U2.M14 U2.M15 U2.N4 U2.N6 U2.N7 U2.N8 U2.N9 U2.N10 U2.N11 U2.N12 U2.N14 U2.N15 U2.P3 U2.P4 U2.P6 U2.P7 U2.P8 U2.P9 U2.P10 U2.P11 U2.P12 U2.P14 U2.P15 U2.R4 U2.R6 U2.R7 U2.R8 U2.R9 U2.R10 U2.R11 U3.1 U3.21 U4.10 U4.11 U4.13 U4.14 U6.5 U15.4 U15.5 U15.12 U15.13

## Polygon pours and split planes (outlines as drawn)
GND on Bottom Layer "NONET_L-01_P-001" (solid, pour order 6): 0.5,3140 0.5,390 685,390 685,1900 1455,1900 1455,390 4755,390 4755,3140 2245,3140 2245,3210 1575,3210 1575,3140
GND on Top Layer "NONET_L-01_P-001" (solid, pour order 7): 0.5,3140 0.5,390 685,390 685,1900 1455,1900 1455,390 4755,390 4755,3140 2250,3140 2250,3215 2245,3210 1575,3210 1575,3140
3V3 on 3V3 (split plane): 386 vertices, not listed, extent 20.1,409.1 4729.9,3619.9
GND on GND (split plane): 2224.9,3140 2225.29,3136.08 2226.43,3132.31 2228.29,3128.83 2230.79,3125.79 2233.83,3123.29 2237.31,3121.43 2241.08,3120.29 2245,3119.9 4729.9,3119.9 4729.9,409.1 1468.74,409.1 1469.74,409.71 1472.73,412.27 1475.29,415.26 1477.34,418.62 1478.85,422.25 1479.77,426.08 1480.08,430 1479.77,433.92 1478.85,437.75 1477.34,441.38 1475.29,444.74 1475.08,444.99 1475.08,1890 1474.77,1893.92 1473.85,1897.75 1472.34,1901.38 1470.29,1904.74 1467.73,1907.73 1464.74,1910.29 1461.38,1912.34 1457.75,1913.85 1453.92,1914.77 1450,1915.08 680,1915.08 676.08,1914.77 672.25,1913.85 668.62,1912.34 665.26,1910.29 662.27,1907.73 659.71,1904.74 657.66,1901.38 656.15,1897.75 655.23,1893.92 654.92,1890 655.12,1887.5 654.92,1885 654.92,415 655.23,411.08 655.47,410.1 20.1,410.1 20.1,3119.9 635,3119.9 638.92,3120.29 642.69,3121.43 646.17,3123.29 649.21,3125.79 651.71,3128.83 653.57,3132.31 654.71,3136.08 655.1,3140 655.1,3619.9 1479.9,3619.9 1479.9,3140 1480.29,3136.08 1481.43,3132.31 1483.29,3128.83 1485.79,3125.79 1488.83,3123.29 1492.31,3121.43 1496.08,3120.29 1500,3119.9 1570,3119.9 1573.92,3120.29 1577.69,3121.43 1581.17,3123.29 1584.21,3125.79 1586.71,3128.83 1588.57,3132.31 1589.71,3136.08 1590.1,3140 1590.1,3619.9 2224.9,3619.9
CGND on GND (split plane): 285 vertices, not listed, extent 704.53,409.1 1441.26,1864.92

## Keep-outs
Keep-Out Layer:
  rectangle: 4400,390 4750,3140
  rectangle: 0,390 350,3140
  rectangle: 4400,390 4750,3140

## Other copper
GND (plane layer: these items are gaps in the copper):
  lines w50: 680,415 680,1885 ; 680,1890 1450,1890 1450,435 1455,430
3V3 (plane layer: these items are gaps in the copper):
  lines w50: 685,430 685,1890 1450,1890 1450,435 ; 1390,1895 1420,1895

## Silkscreen, mask and mechanical layers (free items; w line width, h text height)
Top Overlay:
  text "1V8" at 715,2995 h60
  text "5V0" at 715,2425 h60
  text "CANH" at 1310,2225 h60 r90
  text "CANL" at 1390,2225 h60 r90
  text "UARTRX" at 1475,2115 h60 r90
  text "UARTTX" at 1555,2110 h60 r90
  text "GND" at 710,2075 h60
  text "3V3" at 4145,805 h60
Top Solder:
  region: 3955,1985 3955,1825 4175,1825 4175,1985
  region: 3945,1475 3945,1315 4155,1315 4155,1475
PCB Cutout:
  the board outline again, w10

## Text inside footprints (layer, text, board x,y; h text height)
SW1: Mechanical 7 "Default Padstyle: RX61Y39D0T" at 3715,2361.5 h50; Mechanical 7 "Alt 1 Padstyle: RX60Y90D30P" at 3727.5,2241.5 h50; Mechanical 7 "Alt 2 Padstyle: RX90Y0D30P" at 3740,2181.5 h50; Mechanical 7 "0.207in/5.25mm" at 3977.5,2586.5 h25; Mechanical 7 "0.177in/4.496mm" at 3971.25,3038.5 h25; Mechanical 7 "0.126in/3.2mm" at 4278.85,2807.5 h25; Mechanical 7 "0.177in/4.496mm" at 4528.85,2807.5 h25
U3: Mechanical 13 "*" at 1885,1461.5 h50 r90; Mechanical 7 "0.234in/5.944mm" at 2247,1471.25 h25 r90; Mechanical 7 "0.234in/5.944mm" at 1962.5,1105.5 h25 r90; Mechanical 7 "0.242in/6.147mm" at 1962.5,1887 h25 r90; Mechanical 7 "0.242in/6.147mm" at 1628,1471.25 h25 r90; Mechanical 7 "0.03in/0.762mm" at 1703,1583.5 h25 r90; Mechanical 7 "0.02in/0.508mm" at 1892.5,1812 h25 r90; Mechanical 7 "Alt 2 Padstyle: OX90Y60D30P" at 2633,1227.5 h50 r90; Mechanical 7 "Alt 1 Padstyle: OX60Y90D30P" at 2573,1227.5 h50 r90; Mechanical 7 "Via Padstyle: EX40Y40D20P" at 2513,1252.5 h50 r90; Mechanical 7 "Heat Tab Padstyle: RX152Y152D0T" at 2453,1177.5 h50 r90; Mechanical 7 "Default Padstyle: RX10Y42D0T" at 2393,1215 h50 r90; Top Overlay "*" at 1875,1390 h50 r90